# Altium PCB LED BAO.PcbDoc
Units mil, origin at the board's own origin, x right, y up, seen from the top; angles counter-clockwise.
Board outline 6000 x 4000 mil, 2 copper layers (Top Layer, Bottom Layer); 5 components, 5 nets, 13 pads, 0 vias.
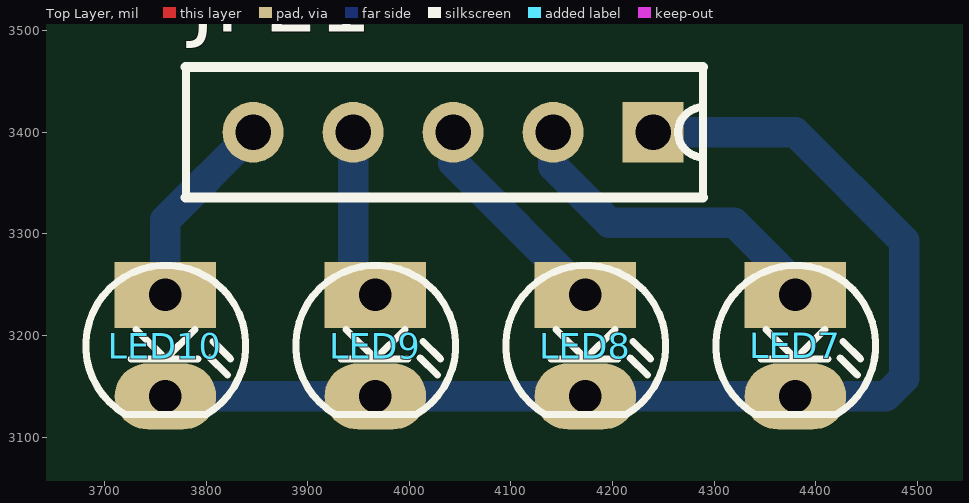
[diagram p0: Top Layer view]
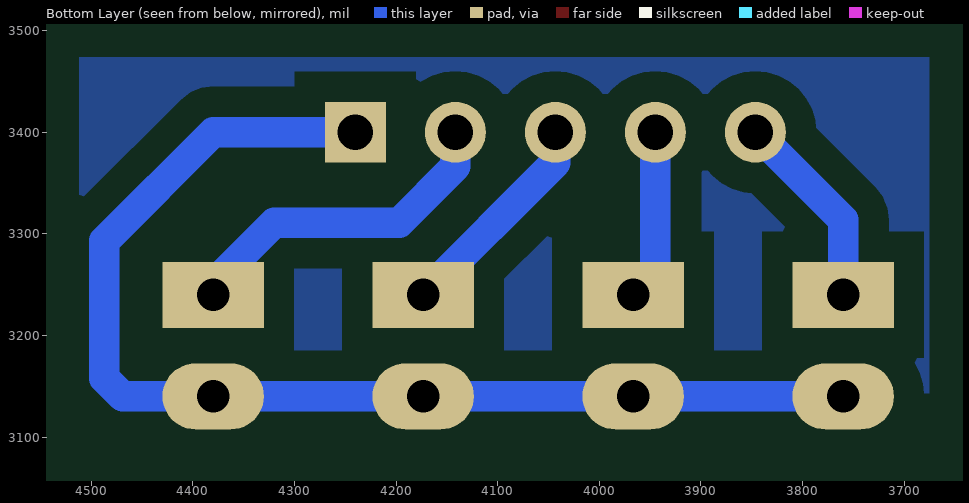
[diagram p1: Bottom Layer view, seen from below]
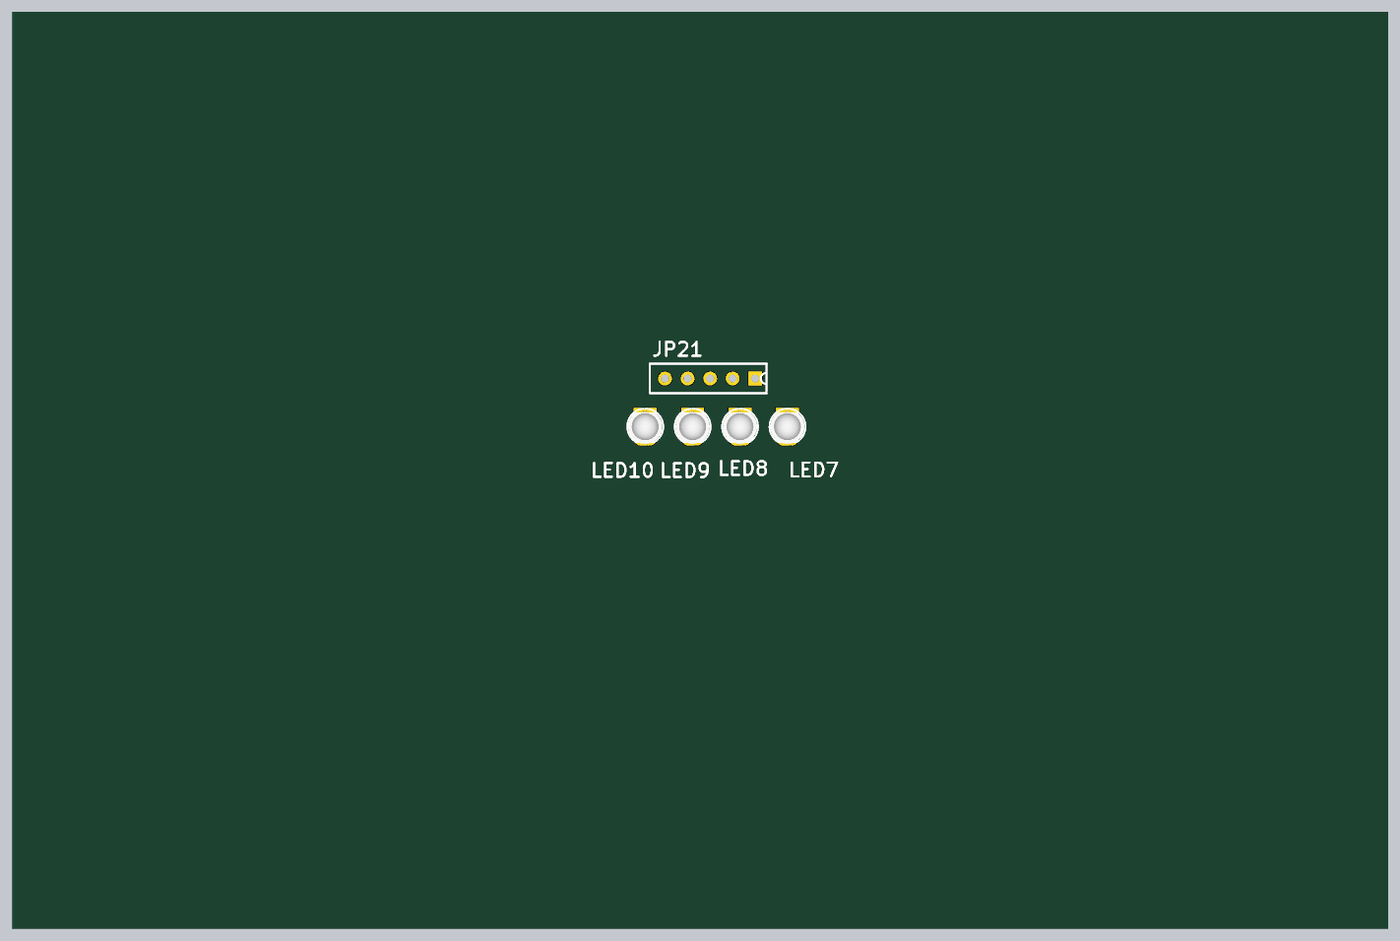
[diagram p2: 3D render of the assembled board from above, using the file's embedded part models]

## Layer stack, top to bottom
Top Layer: signal copper 1.4
Dielectric: dielectric 12.6, FR-4, Dk 4.8
Bottom Layer: signal copper 1.4

## Board outline
1000,1000 7000,1000 7000,5000 1000,5000

## Design rules (kind name [scope] priority, off if disabled: settings)
Clearance [All] p1: gap=30
PolygonConnect [All] p1: connectstyle=Relief reliefconductorwidth=10 reliefentries=4 polygonreliefangle="90 Angle"
RoomDefinition "LED BAO" [InComponentClass('LED BAO')] p1: confinementstyle=ConfineIn formatcopy=TRUE lockcomponents=FALSE outline 7045,1065 8490,1065 8490,1695 7045,1695
RoutingVias [All] p1: holewidth=28 width=50 viastyle="Through Hole" minholewidth=28 minwidth=50 maxholewidth=28 maxwidth=50
SilkscreenOverComponentPads [All] p1: minsilkscreentomaskgap=10
SolderMaskExpansion [All] p1: expansion=4
Width [All] p1: maxlimit=30 minlimit=30 preferedwidth=30
27 further rules are at their usual default settings.

## Components (designator, comment, footprint, x,y, rotation, side; value= is the part's Value field where it differs from the comment)
JP21 "JP5" CON5 4240,3400 r270 top
LED7 "LED" LED-3 4380,3240 r270 top
LED8 "LED" LED-3 4173.33,3240 r270 top
LED9 "LED" LED-3 3966.67,3240 r270 top
LED10 "LED" LED-3 3760,3240 r270 top

## Footprints (in the part's own frame and the unit in brackets; to place one, negate y for a bottom-side part, rotate by r counter-clockwise, add the part's x,y. Pads: shape width x height; smd on the part's side, far side on the other; paste and mask are expansions set on the pad)
CON5 [mil]
  rect 60x60 hole 35: 1(0,0)
  round 60 hole 35: 2(0,-98.43) 3(0,-196.85) 4(0,-295.28) 5(0,-393.7)
  silkscreen extent -64,-460 64,49
LED-3 [mil] "LED 2 PIN, 3ly Only colour"
  rect 65x100 hole 32: 1(0,0)
  oval 65x100 hole 32: 2(100,0)
  silkscreen extent -29,-78 118,79, body extent -13,-75 125,75, height 217

## Part data
JP21: library part Con5, "Connector 5"
LED7 LED8 LED9 LED10: "LED Single colour Green and Red"

## Nets (pads, with @x,y where several pads share a name; then routed paths per layer and width w, separated by ;. In a path a pad name is that pad's centre, name@x,y a point inside that pad or via, vN(x,y) a via of type N, cw(c..) or ccw(c..) an arc to the next point about the centre after c; other vN are vias at no path point)
NetJP21_1: JP21.1 LED7.2 LED8.2 LED9.2 LED10.2 | length 1160.8
  Bottom Layer w30: LED10.2 LED9.2 LED8.2 LED7.2 4469,3140 4487,3158 4487,3293 4380,3400 JP21.1
NetJP21_2: JP21.2 LED7.1 | length 330.8
  Bottom Layer w30: JP21.2 4141.57,3366.43 4197,3311 4320,3311 4380,3251 LED7.1
NetJP21_3: JP21.3 LED8.1 | length 213.9
  Bottom Layer w30: JP21.3 4043.15,3370.18 LED8.1
NetJP21_4: JP21.4 LED9.1 | length 169.1
  Bottom Layer w30: JP21.4 3944.72,3261.94 LED9.1
NetJP21_5: JP21.5 LED10.1 | length 195.7
  Bottom Layer w30: LED10.1 3760,3313.7 JP21.5

## Polygon pours and split planes (outlines as drawn)
no net on Bottom Layer "Bottom Layer-No Net" (solid): 3674,3474 4512,3474 4512,3098 4510,3096 3675,3096 3675,3473 3674,3474